# Altium PCB LTC2990 Breakout.PcbDoc
Units mil, origin at the board's own origin, x right, y up, seen from the top; angles counter-clockwise.
Board outline 500 x 600 mil, 2 copper layers (Top Layer, Bottom Layer); 8 components, 10 nets, 30 pads, 6 vias.
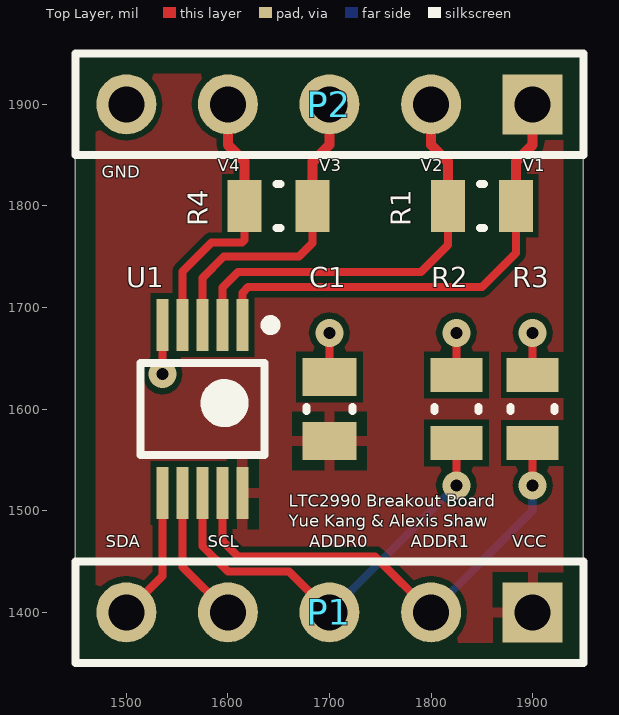
[diagram p0: Top Layer view]
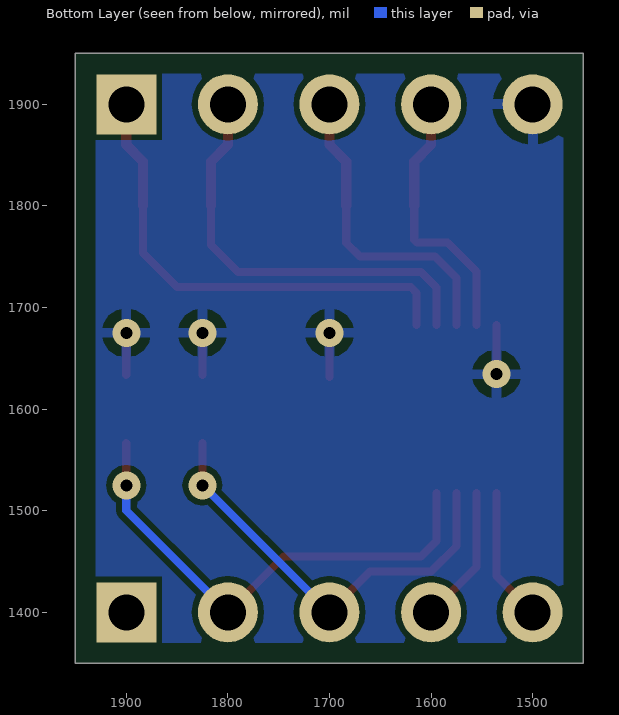
[diagram p1: Bottom Layer view, seen from below]

## Layer stack, top to bottom
Top Solder: solder mask 0.4, Solder Resist, Dk 3.5
Top Layer: signal copper 1.4
Dielectric 1: dielectric 12.6, FR-4, Dk 4.8
Bottom Layer: signal copper 1.4
Bottom Solder: solder mask 0.4, Solder Resist, Dk 3.5

## Board outline
1450,1350 1450,1950 1950,1950 1950,1350

## Design rules (kind name [scope] priority, off if disabled: settings)
Clearance [All] p1: gap=6
MinimumSolderMaskSliver [All] p1: minsoldermaskwidth=3
PolygonConnect [All] p1: connectstyle=Relief reliefconductorwidth=10 reliefentries=4 polygonreliefangle="90 Angle" airgapwidth=10
RoutingVias [All] p1: holewidth=28 width=50 viastyle="Through Hole" minholewidth=11.81 minwidth=27.56 maxholewidth=28 maxwidth=50
SolderMaskExpansion [All] p1: expansion=4
UnpouredPolygon [All] p1: allowunpoured=FALSE
Width [All] p1: maxlimit=10 minlimit=8 preferedwidth=10
28 further rules are at their usual default settings.

## Components (designator, comment, footprint, x,y, rotation, side; value= is the part's Value field where it differs from the comment)
C1 "CAP 1uF 35V 0805(2012)" CAPC0805(2012)145_L 1700,1600 r270 top
P1 "Header 5" HDR1X5 1900,1400 r180 top
P2 "Header 5" HDR1X5 1900,1900 r180 top
R1 "1R 5% 0805(2012)" RESC0805(2012)_L 1850,1800 r0 top
R2 "10K 5% 0805(2012)" RESC0805(2012)_L 1825,1600 r90 top
R3 "10K 5% 0805(2012)" RESC0805(2012)_L 1900,1600 r90 top
R4 "1R 5% 0805(2012)" RESC0805(2012)_L 1650,1800 r0 top
U1 "LTC2990" "LT-MS 10-MSOP" 1575,1600 r270 top

## Footprints (in the part's own frame and the unit in brackets; to place one, negate y for a bottom-side part, rotate by r counter-clockwise, add the part's x,y. Pads: shape width x height; smd on the part's side, far side on the other; paste and mask are expansions set on the pad)
CAPC0805(2012)145_L [mm] "Chip Capacitor, Body 2.0x1.2mm, Height 1.45mm, IPC High Density"
  rect 0.95x1.35 smd: 1(-0.8,0) 2(0.8,0)
  silkscreen extent -0.05,-0.58 0.05,0.58, body extent -1.1,-0.72 1.1,0.72, height 1.45
HDR1X5 [mm] "Connector; Header; 5 Position"
  rect 1.5x1.5 hole 0.9: 1(0,0)
  round 1.5 hole 0.9: 2(2.54,0) 3(5.08,0) 4(7.62,0) 5(10.16,0)
  silkscreen extent -1.27,-1.27 11.43,1.27
"LT-MS 10-MSOP" [mm] "TSSOP, 10-Leads, Body 3.00x2.99mm, Pitch 0.50mm, IPC Medium Density"
  rect 1.3x0.3 smd: 1(-2.1,1) 2(-2.1,0.5) 3(-2.1,0) 4(-2.1,-0.5) 5(-2.1,-1) 6(2.1,-1) 7(2.1,-0.5) 8(2.1,0) 9(2.1,0.5) 10(2.1,1)
  silkscreen extent -2.22,-1.55 1.15,1.83, body extent -1.55,-1.55 1.55,1.55, height 1.1
RESC0805(2012)_L [mm] "Chip Resistor, Body 2.0x1.3mm, IPC High Density"
  rect 0.85x1.3 smd: 1(-0.85,0) 2(0.85,0)
  silkscreen extent -0.05,-0.55 0.05,0.55, body extent -1.1,-0.67 1.1,0.68, height 0.7

## Part data
C1: library part CMP-1036-04759-1, "CAP 1uF 35V ±10% 0805 (2012 Metric) Thickness 1.45mm SMD"
P1 P2: "Header, 5-Pin"
R1 R4: library part CMP-1013-00002-1, "1R 0.125W 5% 0805 (2012 Metric)  SMD"
R2 R3: library part CMP-1013-00098-1, "10K 0.125W 5% 0805 (2012 Metric)  SMD"
U1: "Quad I2C Voltage, Current and Temperature Monitor"

## Via types
v1: diameter 27.56, hole 11.81, Top Layer to Bottom Layer, tented both sides, 6 vias

## Nets (pads, with @x,y where several pads share a name; then routed paths per layer and width w, separated by ;. In a path a pad name is that pad's centre, name@x,y a point inside that pad or via, vN(x,y) a via of type N, cw(c..) or ccw(c..) an arc to the next point about the centre after c; other vN are vias at no path point)
GND: C1.1 P2.5 R2.2 R3.2 U1.5 | length 174.9
  Top Layer w8: v1(1535.63,1634.37) U1.5 ; C1.1 v1(1700,1675) ; R2.2 v1(1825,1675) ; R3.2 v1(1900,1675)
NetP1_2: P1.2 R3.1 U1.9 | length 489.4
  Top Layer w8: U1.9 1594.69,1470.31 1610,1455 1745,1455 P1.2 ; v1(1900,1525) R3.1
  Bottom Layer w8: P1.2 1900,1500 v1(1900,1525)
NetP1_3: P1.3 R2.1 U1.8 | length 422.6
  Top Layer w8: U1.8 1575,1465 1600,1440 1660,1440 P1.3 ; v1(1825,1525) R2.1
  Bottom Layer w8: P1.3 v1(1825,1525)
NetP1_4: P1.4 U1.7 | length 135.8
  Top Layer w8: U1.7 1555.32,1444.68 P1.4
NetP1_5: P1.5 U1.6 | length 132.1
  Top Layer w8: P1.5 1535.63,1435.63 U1.6
NetP2_1: P2.1 R1.2 U1.1 | length 470.4
  Top Layer w8: U1.1 1614.37,1714.37 1620,1720 1850,1720 1883.46,1753.46 R1.2
  Top Layer w10: R1.2 1883.46,1843.46 1900,1860 P2.1
NetP2_2: P2.2 R1.1 U1.2 | length 421.5
  Top Layer w8: U1.2 1594.69,1719.69 1610,1735 1790,1735 1816.54,1761.54 R1.1
  Top Layer w10: P2.2 1800,1860 1816.54,1843.46 R1.1
NetP2_3: P2.3 R4.2 U1.3 | length 312.4
  Top Layer w8: U1.3 1575,1729 1596,1750 1670,1750 1683.46,1763.46 R4.2
  Top Layer w10: R4.2 1683.46,1843.46 1700,1860 P2.3
NetP2_4: P2.4 R4.1 U1.4 | length 267.1
  Top Layer w8: U1.4 1555.32,1735.32 1584,1764 1614,1764 1616.54,1766.54 R4.1
  Top Layer w10: P2.4 1600,1860 1616.54,1843.46 R4.1
VCC: C1.2 P1.1 U1.10

## Polygon pours and split planes (outlines as drawn)
VCC on Top Layer "Top Layer-No Net" (solid, remove dead copper, pour order 6): 1470,1930 1930,1930 1930,1370 1470,1370
GND on Bottom Layer "Top Layer-No Net" (solid, pour order 8): 1470,1930 1930,1930 1930,1370 1470,1370

## Silkscreen, mask and mechanical layers (free items; w line width, h text height)
Top Overlay:
  text "V4" at 1590,1830 h20
  text "V3" at 1690,1830 h20
  text "V2" at 1790,1830 h20
  text "V1" at 1890,1830 h20
  text "GND" at 1476.06,1823.62 h20
  text "LTC2990 Breakout Board" at 1660,1500 h20
  text "Yue Kang & Alexis Shaw" at 1660,1480 h20
  text "SDA" at 1480,1460 h20
  text "SCL" at 1580,1460 h20
  text "ADDR0" at 1680,1460 h20
  text "ADDR1" at 1780,1460 h20
  text "VCC" at 1880,1460 h20
Mechanical 1:
  the board outline again, w10